# Altium PCB PCB_Микроконтроллер_2_2024-08-27.pcbdoc
Units mm, origin at the board's own origin, x right, y up, seen from the top; angles counter-clockwise.
Board outline 83.14 x 67.18 mm, 2 copper layers (Top Layer, Bottom Layer); 19 components, 17 nets, 81 pads, 3 vias.
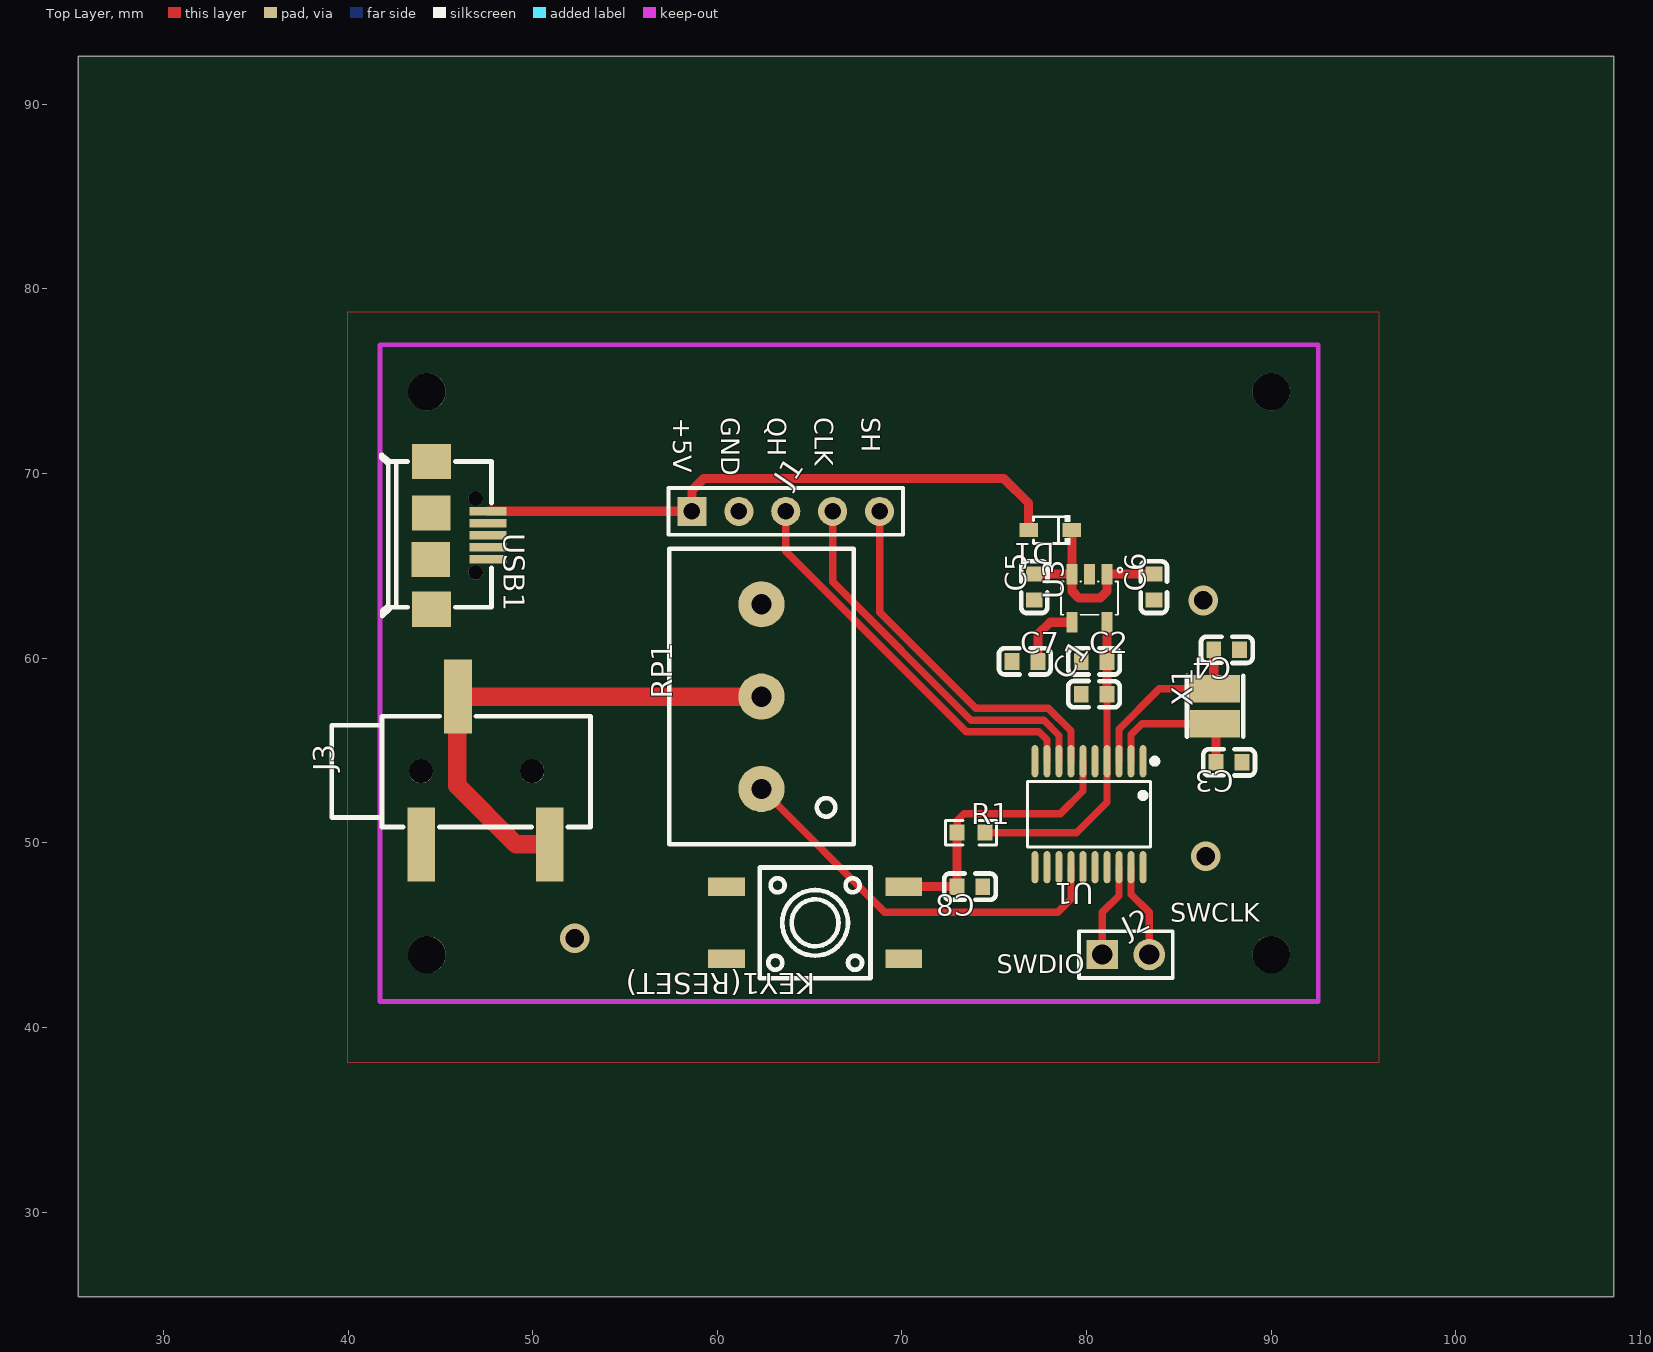
[diagram p0: Top Layer view]
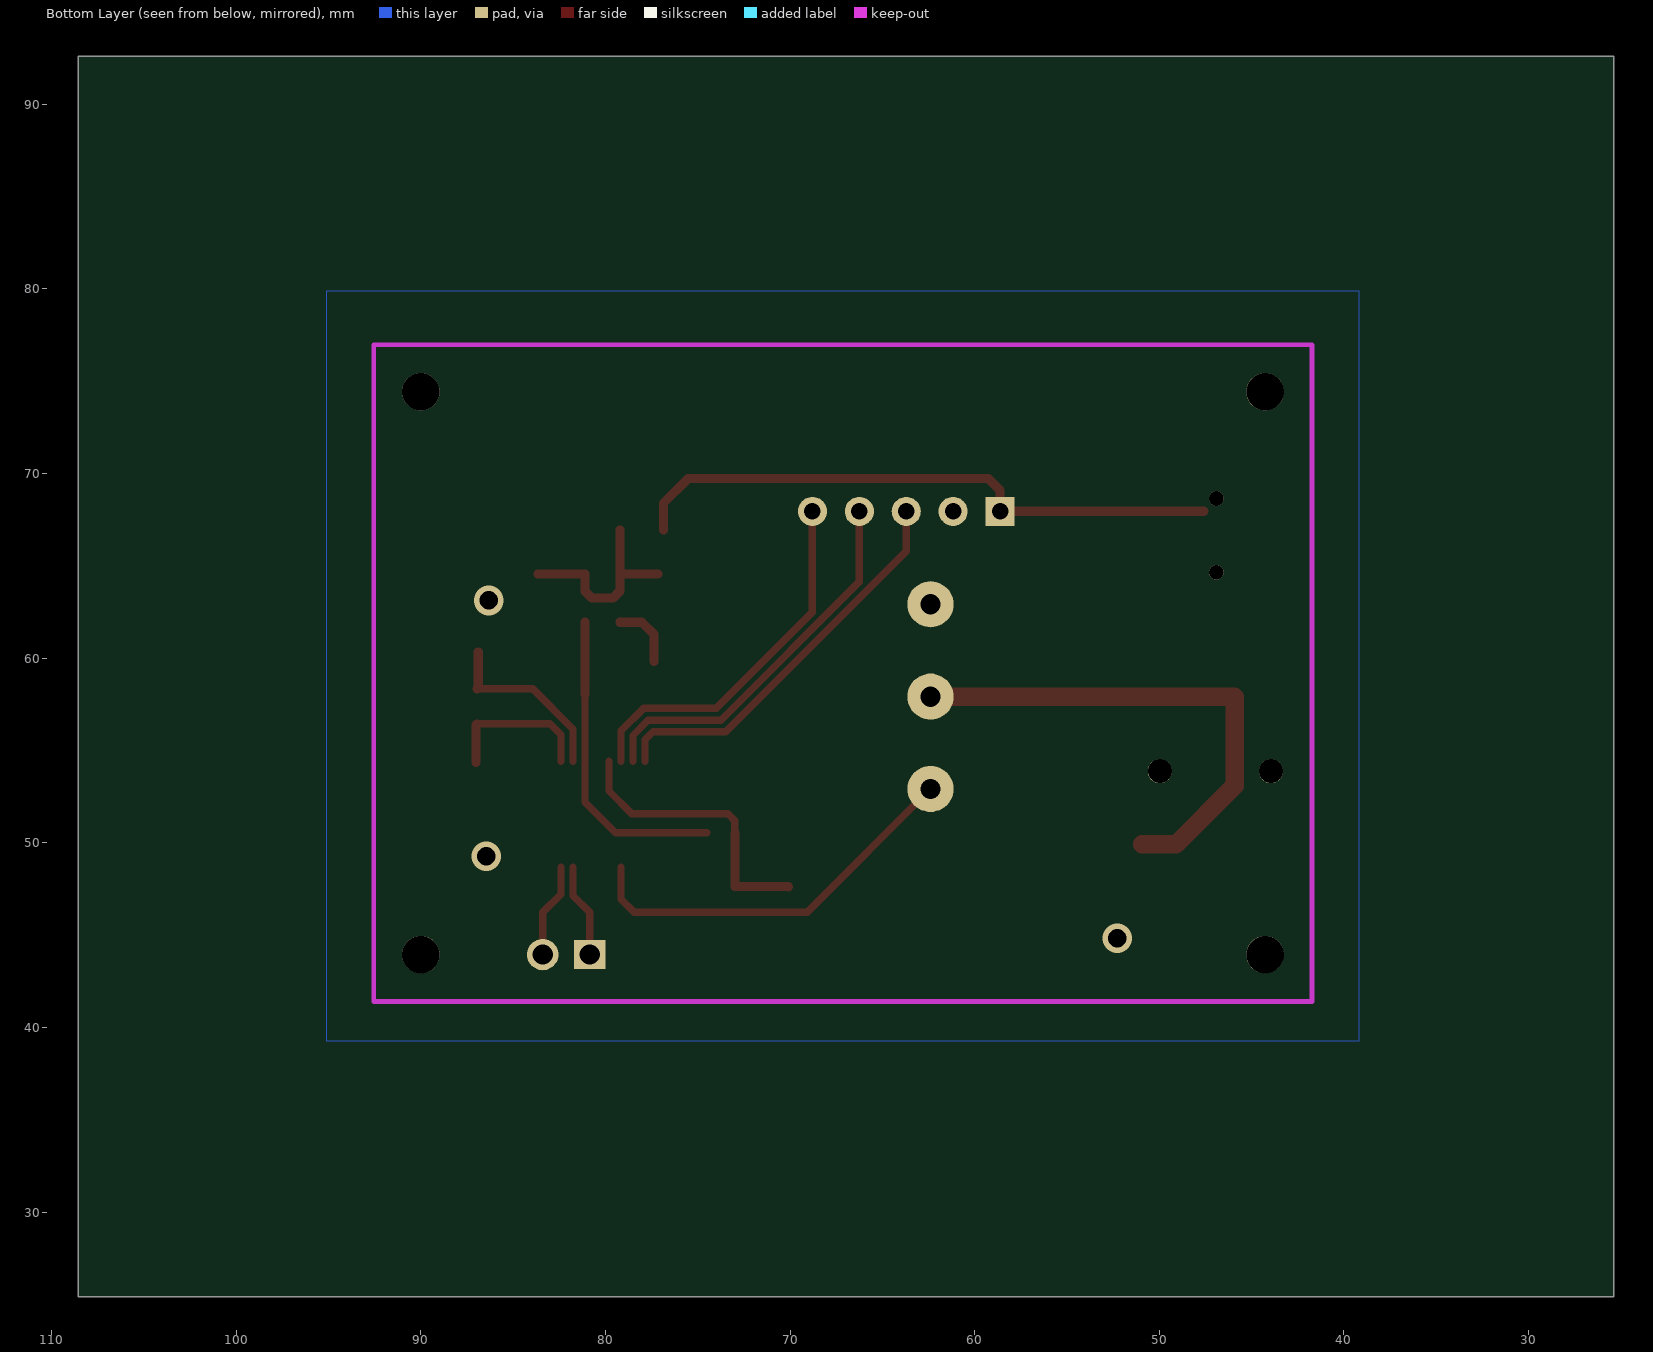
[diagram p1: Bottom Layer view, seen from below]

## Layer stack, top to bottom
Top Layer: signal copper (thickness not stored)
Dielectric: dielectric 0.32, FR-4, Dk 4.8
Bottom Layer: signal copper (thickness not stored)

## Board outline
108.538,25.4 25.4,25.4 25.4,92.583 108.538,92.583

## Components (designator, comment, footprint, x,y, rotation, side; value= is the part's Value field where it differs from the comment)
C1 "1uF" C0603 80.403,58.039 r0 top
C2 "100nF" C0603 80.403,59.817 r0 top
C3 "10pF" C0603 87.71,54.356 r180 top
C4 "10pF" C0603 87.583,60.452 r180 top
C5 "1uF" C0603 77.169,63.846 r90 top
C6 "100nF" C0603 83.646,63.846 r90 top
C7 "10nF" C0603 76.661,59.817 r0 top
C8 "0.1u" C0603 73.678,47.625 r180 top
D1 "BAT60JFILM" SOD-323_L1.8-W1.3-LS2.5-RD 78.031,66.929 r180 top
J1 "HDR-M-2.54_1x5" HDR-M-2.54_1X5 63.707,67.945 r0 top
J2 "HDR-M-2.54_1x2" HDR-M-2.54_1X2 82.122,43.942 r0 top
J3 "320B/PJ-001 3.5Jacks" AUDIO-SMD_C3792 47.451,53.911 r90 top
KEY1(RESET) "K4-6×6_SMD" KEY-SMD_4P-L6.0-W6.0-P3.90-LS10.0 65.297,45.662 r180 top
R1 "100k" R0603 73.74,50.546 r0 top
RP1 "POTRES COPY COPY" ПОТЕНЦИОМЕТР 67.39,65.913 r90 top
U1 "STM32G030F6P6" TSSOP-20_L6.5-W4.4-P0.65-LS6.4-BL 80.128,51.544 r180 top
U3 "LD3985M33R" SOT-23-5_L3.0-W1.7-P0.95-LS2.8-BR 80.154,63.246 r90 top
USB1 "MICRO USB B" "GENERIC MICRO USB / MICRO-USB-SMD_MICRO-USB-16" 46.054,66.644 r270 top
X1 "8MHz" OSC-SMD_2P-L3.2-W2.5 86.954,57.386 r90 top

## Footprints (in the part's own frame and the unit in brackets; to place one, negate y for a bottom-side part, rotate by r counter-clockwise, add the part's x,y. Pads: shape width x height; smd on the part's side, far side on the other; paste and mask are expansions set on the pad)
AUDIO-SMD_C3792 [mil]
  rect 157.48x59.05 smd paste+0 mask+2: 1(-157.5,137) 2(-157.5,-137) 3(157.5,59)
  round 51.18 hole 51.18 unplated paste+0: ""(-1.5,137.64) ""(-1.5,-99.37)
  silkscreen extent -121,-224 116,328
C0603 [mm]
  rect 0.8x0.9 smd paste+0 mask+0.051: 1(-0.7,0) 2(0.7,0)
  silkscreen extent -1.41,-0.71 1.39,0.72
"GENERIC MICRO USB / MICRO-USB-SMD_MICRO-USB-16" [mm]
  rect 0.45x2 smd paste+0 mask+0.051: 1(-1.301,1.535) 2(-0.65,1.535) 3(0,1.535) 4(0.65,1.535) 5(1.3,1.535)
  rect 1.9x2.1 smd paste+0 mask+0.051: 6(-4,-1.535) 6(-1.21,-1.55) 6(1.31,-1.57) 6(4,-1.535)
  round 0.8 hole 0.8 unplated paste+0: ""(-2,0.864) ""(2,0.864)
  silkscreen extent -4.37,-4.26 4.38,1.72
HDR-M-2.54_1X2 [mm]
  rect 1.7x1.575 hole 1.1 paste+0 mask+0.051: 1(-1.27,0)
  round 1.7 hole 1.1 paste+0 mask+0.051: 2(1.27,0)
  silkscreen extent -2.54,-1.27 2.54,1.27
HDR-M-2.54_1X5 [mil]
  rect 62x62 hole 35 paste+0 mask+2: 1(-200,0)
  round 62 hole 35 paste+0 mask+2: 2(-100,0) 3(0,0) 4(100,0) 5(200,0)
  silkscreen extent -250,-50 250,50
KEY-SMD_4P-L6.0-W6.0-P3.90-LS10.0 [mm]
  rect 2x1 smd paste+0 mask+0.051: 1(-4.8,1.95) 2(4.8,1.95) 3(-4.8,-1.95) 4(4.8,-1.95)
  silkscreen extent -3,-3 3,3
OSC-SMD_2P-L3.2-W2.5 [mm]
  rect 1.5x2.7 smd paste+0 mask+0.051: 1(0.95,0) 2(-0.95,0)
  silkscreen extent -1.65,-1.52 1.65,1.52
R0603 [mm]
  rect 0.806x0.864 smd paste-100 mask+0.051: 1(-0.753,0) 2(0.753,0)
  silkscreen extent -1.39,-0.66 1.39,0.66
SOD-323_L1.8-W1.3-LS2.5-RD [mm]
  rect 1x0.75 smd paste+0 mask+0.051: 1(-1.173,0) 2(1.173,0)
  silkscreen extent -1.08,-0.8 0.9,0.8
SOT-23-5_L3.0-W1.7-P0.95-LS2.8-BR [mm]
  rect 1.1x0.6 smd paste+0 mask+0.051: 1(1.3,-0.95) 2(1.3,0) 3(1.3,0.95) 4(-1.3,0.95) 5(-1.3,-0.95)
  silkscreen extent -0.9,-1.78 1.65,1.55
TSSOP-20_L6.5-W4.4-P0.65-LS6.4-BL [mm]
  oval 0.364x1.742 smd paste+0 mask+0.051: 1(-2.925,-2.871) 2(-2.275,-2.871) 3(-1.625,-2.871) 4(-0.975,-2.871) 5(-0.325,-2.871) 6(0.325,-2.871) 7(0.975,-2.871) 8(1.625,-2.871) 9(2.275,-2.871) 10(2.925,-2.871) 11(2.925,2.871) 12(2.275,2.871) 13(1.625,2.871) 14(0.975,2.871) 15(0.325,2.871) 16(-0.325,2.871) 17(-0.975,2.871) 18(-1.625,2.871) 19(-2.275,2.871) 20(-2.925,2.871)
  silkscreen extent -3.71,-3.02 3.33,1.77
ПОТЕНЦИОМЕТР [mm]
  round 2.5 hole 1.1 paste+0 mask+0.051: 1(-13,4.999) 2(-8.001,4.999) 3(-3,4.999)
  silkscreen extent -16,0 0,10

## Free pads (board coordinates)
  round 2.032 hole 2.032 unplated paste+0: ""(44.276,43.942) ""(44.276,74.422) ""(89.996,43.942) ""(89.996,74.422)

## Via types
v1: diameter 1.6, hole 1, Top Layer to Bottom Layer, tented both sides, 3 vias

## Nets (pads, with @x,y where several pads share a name; then routed paths per layer and width w, separated by ;. In a path a pad name is that pad's centre, name@x,y a point inside that pad or via, vN(x,y) a via of type N, cw(c..) or ccw(c..) an arc to the next point about the centre after c; other vN are vias at no path point)
+3V3: C1.2 C2.2 R1.2 U1.4 U3.5 | length 17
  Top Layer w0.4: R1.2 79.455,50.546 81.103,52.194 U1.4 ; U1.4 C1.2
  Top Layer w0.5: C1.2 C2.2 U3.5
+5V: D1.2 J1.1 USB1.1 | length 32.7
  Top Layer w0.5: USB1.1 J1.1 58.627,69.088 59.262,69.723 75.518,69.723 76.859,68.382 D1.2
CLK: J1.4 U1.8 | length 20.9
  Top Layer w0.4: J1.4 66.247,64.135 73.74,56.642 77.677,56.642 78.504,55.804 U1.8
GND: C1.1 C2.1 C3.1 C4.1 C5.1 C6.1 C7.1 C8.1 J1.2 J3.1 KEY1(RESET).2 RP1.3 U1.5 U3.2 USB1.5
  other v1: 52.277,44.831 86.44,49.276 86.313,63.119
J3_2: J3.2 J3.3 RP1.2 | length 27.6
  Top Layer w1: J3.2 49.102,49.911 45.927,53.086 45.927,57.887 J3.3 RP1.2
QH: J1.3 U1.9 | length 21.7
  Top Layer w0.4: J1.3 63.707,65.786 73.486,56.007 77.423,56.007 77.853,55.575 U1.9
S$6: 
S$19: 
SH/LD#: J1.5 U1.7 | length 20.1
  Top Layer w0.4: J1.5 68.787,62.484 73.994,57.277 77.931,57.277 79.153,56.054 U1.7
SWCLK: J2.2 U1.19 | length 5.1
  Top Layer w0.4: U1.19 82.404,47.216 83.392,46.228 J2.2
SWDIO: J2.1 U1.18 | length 5.1
  Top Layer w0.4: J2.1 80.852,46.228 81.754,47.13 U1.18
U1_2: C3.2 U1.2 X1.2 | length 8.3
  Top Layer w0.4: U1.2 82.403,55.842 82.998,56.436 X1.2
  Top Layer w0.5: X1.2 87.009,56.381 C3.2
U1_3: C4.2 U1.3 X1.1 | length 9.9
  Top Layer w0.4: U1.3 81.753,56.147 83.943,58.336 X1.1
  Top Layer w0.5: C4.2@86.882,60.325 86.882,58.408 X1.1
U1_6: C8.2 KEY1(RESET).3 R1.1 U1.6 | length 15.5
  Top Layer w0.4: R1.1@72.985,50.546 72.985,51.189 73.359,51.562 78.566,51.562 79.802,52.799 U1.6@79.802,54.414
  Top Layer w0.5: 70.096,47.612 C8.2 ; C8.2 72.986,47.634 R1.1
U1_14: RP1.1 U1.14 | length 21.6
  Top Layer w0.4: RP1.1 69.076,46.228 78.439,46.228 79.153,46.943 U1.14
U3_1: C5.2 C6.2 D1.1 U3.1 U3.3 | length 11
  Top Layer w0.5: C5.2 U3.3@79.203,64.546 ; D1.1@79.204,66.929 U3.3@79.204,64.546 ; C6.2 81.103,64.546 81.103,63.624 80.725,63.246 79.582,63.246 79.203,63.63 U3.3@79.203,64.546
U3_4: C7.2 U3.4 | length 3.6
  Top Layer w0.5: C7.2 77.361,61.279 78.027,61.946 U3.4
pads on no net: J3. KEY1(RESET).1 KEY1(RESET).4 U1.1 U1.10 U1.11 U1.12 U1.13 U1.15 U1.16 U1.17 U1.20 USB1. USB1.2 USB1.3 USB1.4 USB1.6

## Polygon pours and split planes (outlines as drawn)
GND on Bottom Layer (solid): 39.196,79.883 39.196,39.243 95.076,39.243 95.076,79.883
GND on Top Layer (solid): 39.958,78.74 39.958,38.1 95.838,38.1 95.838,78.74

## Silkscreen, mask and mechanical layers (free items; w line width, h text height)
Top Overlay:
  text "GND" at 60.204,73.038 h1 r270
  text "QH" at 62.744,73.038 h1 r270
  text "CLK" at 65.284,73.038 h1 r270
  text "SH" at 67.824,73.038 h1 r270
  text "+5V" at 57.619,73.025 h1 r270
  text "SWCLK" at 84.535,45.728 h1
  text "SWDIO" at 75.137,42.934 h1